# EAGLE board µECU-CAN-Adapter_Heizkoerperthermostat (EAGLE 7.7.0)
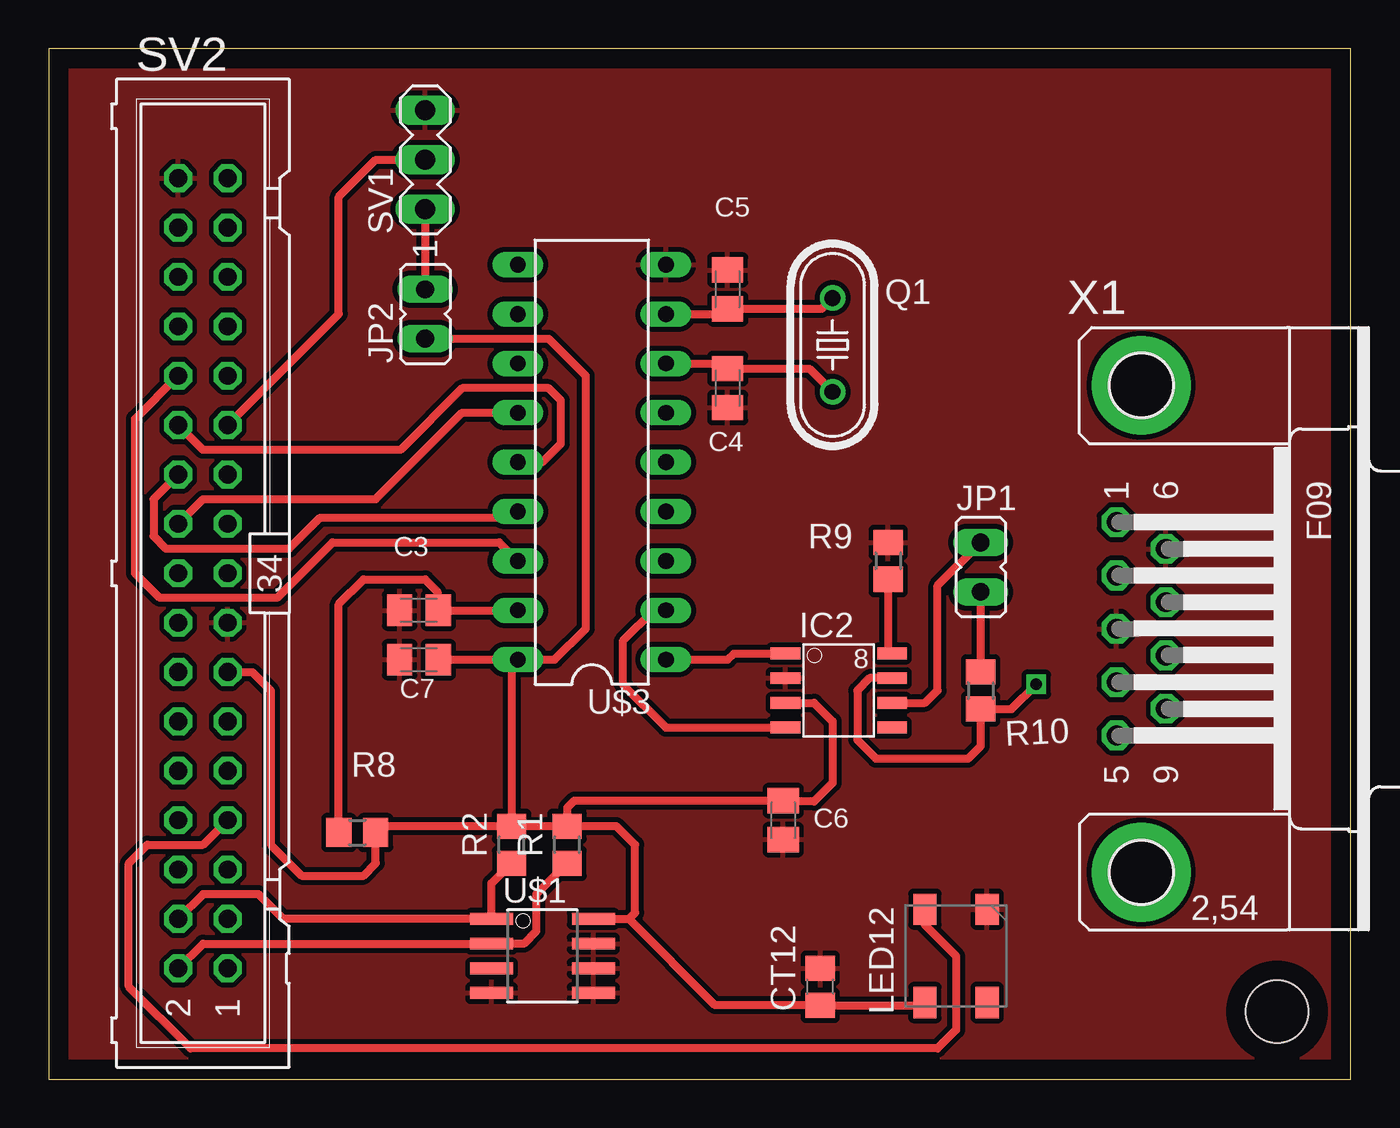
[diagram p0: board, top side]
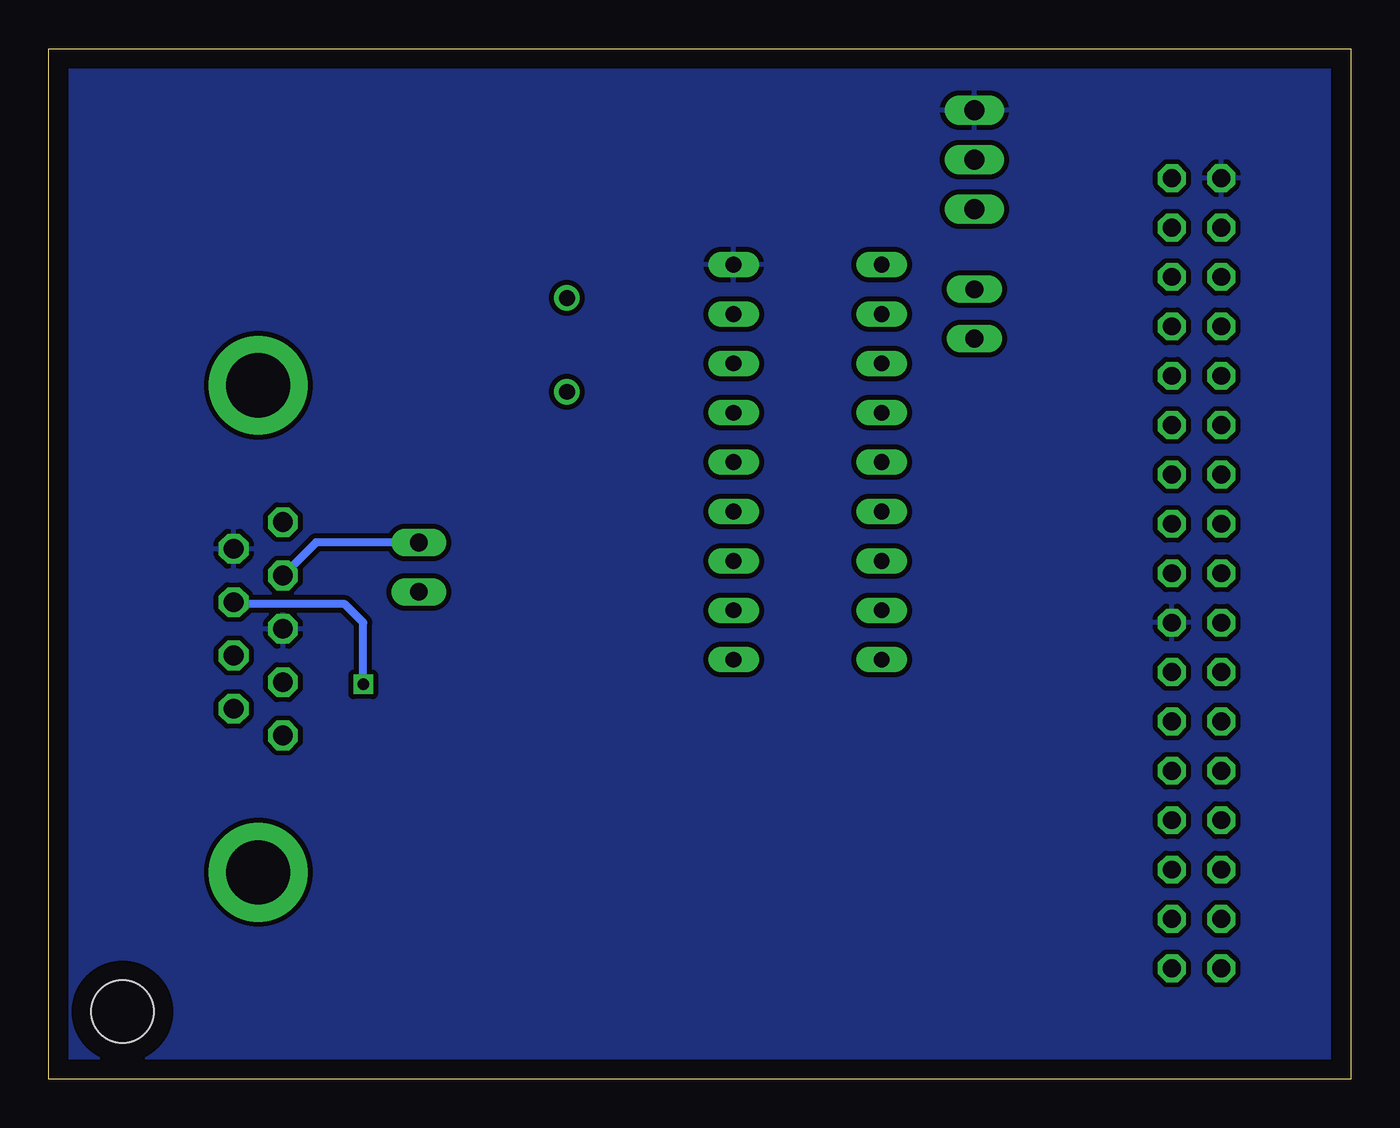
[diagram p1: board, bottom side, seen from below]

Size 66.98 x 53.01 mm. Coordinates in mm from the lower left corner, seen from the top.
Outline: 0,53.01 0,0 66.98,0 66.98,53.01 0,53.01
Copper layers (1*16): Top 0.035mm / dielectric 1.5mm / Bottom 0.035mm
Design rules "default *": minimum track width 6mil, minimum drill 0.35mm, track to track 8mil, track to pad 8mil, pad to pad 8mil, via to via 8mil, smd to smd 6mil, copper to edge 40mil, drill to drill 6mil, minimum pad ring 10mil, minimum via ring 8mil, stop-mask expansion 4mil, vias tented up to drill 0mil, thermal gap 10mil
Holes 3.2 mm at 63.18,3.48

## Footprints (pad centres in the part's own frame; a part is rotated, then mirrored left to right if it is on the bottom)
C0805K = smd 1.3 x 1.6: 1 -1,0; 2 1,0
C0805 = smd 1.3 x 1.5: 1 -0.95,0; 2 0.95,0
SO8 = smd 0.61 x 1.524: 1 -1.27,-2.743; 2 0,-2.743; 3 1.27,-2.743; 4 2.54,-2.743; 5 2.54,2.743; 6 1.27,2.743; 7 0,2.743; 8 -1.27,2.743
JP1 = drill 0.914 long: 1 0,-1.27; 2 0,1.27
WS2812_4 = smd 1.6 x 1.2: 1 2.4,-1.6; 2 2.4,1.6; 3 -2.4,1.6; 4 -2.4,-1.6
HC49/S = drill 0.813: 1 -2.413,0; 2 2.413,0
R0805 = smd 1.3 x 1.5: 1 -0.95,0; 2 0.95,0
MA03-1 = drill 1.016 long: 1 -2.54,0; 2 0,0; 3 2.54,0
ML34 = drill 0.914 octagon: 1 -20.32,-1.27; 2 -20.32,1.27; 3 -17.78,-1.27; 4 -17.78,1.27; 5 -15.24,-1.27; 6 -15.24,1.27; 7 -12.7,-1.27; 8 -12.7,1.27; 9 -10.16,-1.27; 10 -10.16,1.27; 11 -7.62,-1.27; 12 -7.62,1.27; 13 -5.08,-1.27; 14 -5.08,1.27; 15 -2.54,-1.27; 16 -2.54,1.27; 17 0,-1.27; 18 0,1.27; 19 2.54,-1.27; 20 2.54,1.27; 21 5.08,-1.27; 22 5.08,1.27; 23 7.62,-1.27; 24 7.62,1.27; 25 10.16,-1.27; 26 10.16,1.27; 27 12.7,-1.27; 28 12.7,1.27; 29 15.24,-1.27; 30 15.24,1.27; 31 17.78,-1.27; 32 17.78,1.27; 33 20.32,-1.27; 34 20.32,1.27
SO08 = smd 0.61 x 2.21: 1 -1.905,-2.616; 2 -0.635,-2.616; 3 0.635,-2.616; 4 1.905,-2.616; 5 1.905,2.616; 6 0.635,2.616; 7 -0.635,2.616; 8 -1.905,2.616
DIL18 = drill 0.813 long: 1 -10.16,-3.81; 2 -7.62,-3.81; 3 -5.08,-3.81; 4 -2.54,-3.81; 5 0,-3.81; 6 2.54,-3.81; 7 5.08,-3.81; 8 7.62,-3.81; 9 10.16,-3.81; 10 10.16,3.81; 11 7.62,3.81; 12 5.08,3.81; 13 2.54,3.81; 14 0,3.81; 15 -2.54,3.81; 16 -5.08,3.81; 17 -7.62,3.81; 18 -10.16,3.81
F09HP = drill 1.016 octagon: 1 -5.486,-1.27; 2 -2.743,-1.27; 3 0,-1.27; 4 2.743,-1.27; 5 5.486,-1.27; 6 -4.115,1.27; 7 -1.372,1.27; 8 1.372,1.27; 9 4.115,1.27 | drill 3.302 pad 5.08: G1 -12.522,0; G2 12.522,0

## Placement (x,y rotation side)
C3  100nF  [C0805K]  19.05,24.12 180 top
C4  22pF  [C0805K]  34.92,35.55 270 top
C5  22pF  [C0805K]  34.92,40.63 90 top
C6  100nF  [C0805K]  37.78,13.32 270 top
C7  100nF  [C0805K]  19.05,21.58 180 top
CT12  100n  [C0805]  39.69,4.75 90 top
IC2  PCA82C251  [SO8]  40.64,20.62 270 top
JP1  [JP1]  47.94,26.34 0 top
JP2  [JP1]  19.37,39.36 0 top
LED12  WS2812_4H  [WS2812_4]  46.67,6.34 90 top
Q1  16MHz  [HC49/S]  40.32,37.77 90 top
R1  10k  [R0805]  26.67,12.05 90 top
R2  10k  [R0805]  23.81,12.05 90 top
R8  10k  [R0805]  15.88,12.69 0 top
R9  10k  [R0805]  43.18,26.66 270 top
R10  120  [R0805]  47.94,19.99 270 top
SV1  [MA03-1]  19.37,47.29 90 top
SV2  [ML34]  7.94,26.02 90 top
U$1  [SO08]  25.4,6.34 270 top
U$3  MCP2515PDIP  [DIL18]  27.94,31.74 90 top
X1  [F09HP]  56.2,23.16 270 top

## Library data of the parts
C3-C7 CT12 R1 R2 R8-R10 = rcl
IC2 = philips
JP1 JP2 = jumper
LED12 U$1 U$3 = sp2
Q1 = crystal; OC_FARNELL: 1667008; OC_NEWARK: unknown
SV1 = con-lstb; OC_FARNELL: unknown; OC_NEWARK: unknown
SV2 = con-harting-ml; OC_FARNELL: unknown; OC_NEWARK: unknown
X1 = con-subd; OC_FARNELL: unknown; OC_NEWARK: unknown

## Nets
+5V: C6.1 C7.1 CT12.1 IC2.3 JP2.1 LED12.3 R1.2 R2.2 R8.2 SV2.13 U$1.8 U$3.18
+12V: SV2.33
AREF: SV2.16
GND: C3.2 C4.2 C5.2 C6.2 C7.2 CT12.2 IC2.2 LED12.1 R9.1 SV1.3 SV2.15 SV2.34 U$1.4 U$1.5 U$1.6 U$1.7 U$3.9 X1.3 X1.6
N$1: SV2.14
N$2: C5.1 Q1.2 U$3.8
N$3: C4.1 Q1.1 U$3.7
N$4: C3.1 R8.1 U$3.17
N$5: IC2.8 R9.2
N$6: IC2.4 U$3.2
N$7: IC2.1 U$3.1
N$8: IC2.7 R10.2 X1.7
N$9: JP1.1 R10.1
N$10: IC2.6 JP1.2 X1.2
N$12: LED12.4
N$16: JP2.2 SV1.1
N$40: SV2.29
N$41: SV2.31
N$44: SV2.32
N$45: SV2.30
PB0: SV2.27
PB1: SV2.28
PB2: SV2.26 U$3.16
PB3: SV2.24 U$3.14
PB4: SV2.22 U$3.15
PB5: SV2.20 U$3.13
PB6: SV2.17
PB7: SV2.19
PC0: SV2.12
PC1: SV2.10
PC2: SV2.8
PC3: SV2.6
PC4: R2.1 SV2.4 U$1.1
PC5: R1.1 SV2.2 U$1.2
PC6: SV2.1
PD0: SV2.3
PD1: SV2.5
PD2: LED12.2 SV2.7
PD3: SV2.9
PD4: SV2.11
PD5: SV2.21
PD6: SV1.2 SV2.23
PD7: SV2.25

## Tracks (layer width: path | path; a pad name or v marks a point on that pad's centre or on a via)
+5V
  Top 0.406: R1.2 29.21,13.01 30.16,12.05 30.16,8.56 29.84,8.24 | R1.2 R2.2 | R2.2 17.14,13 R8.2 16.83,11.1 16.19,10.46 13.02,10.46 11.43,12.05 11.43,19.99 10.48,20.94 SV2.13 | LED12.3 44.94,3.8 CT12.1 34.29,3.8 29.84,8.24 | IC2.3 39.37,19.35 40.32,18.4 40.32,15.23 39.37,14.27 37.83,14.27 C6.1 27.04,14.32 26.67,13.96 R1.2 | U$3.18 23.81,21.58 R2.2 | C7.1 U$3.18 | JP2.1 25.72,38.09 27.62,36.18 27.62,23.16 26.04,21.58 U$3.18 | U$1.8 29.84,8.24
GND
  pour Top (isolate 0.254): 0,53.01 0,-0.01 66.99,-0.01 66.99,53.01
  pour Bottom (isolate 0.254): 66.99,53.01 0,53.01 0,-0.01 66.99,-0.01
N$2
  Top 0.406: U$3.8 34.66,39.36 C5.1 39.77,39.63 Q1.2
N$3
  Top 0.406: U$3.7 34.66,36.82 C4.1 39.13,36.55 Q1.1
N$4
  Top 0.406: U$3.17 C3.1 20,24.16 20,25.07 19.37,25.71 16.19,25.71 14.93,24.44 R8.1
N$5
  Top 0.406: R9.2 43.18,22.1 IC2.8
N$6
  Top 0.406: U$3.2 31.11,24.12 29.53,22.53 29.53,20.31 31.75,18.09 IC2.4
N$7
  Top 0.406: U$3.1 34.92,21.58 35.24,21.89 IC2.1
N$8  (via drill 0.6)
  Top 0.406: IC2.7 42.23,20.62 41.59,19.99 41.59,17.45 42.55,16.5 47.31,16.5 47.94,17.13 R10.2 49.53,19.04 v50.8,20.31
  Bottom 0.406: v50.8,20.31 50.8,23.48 51.75,24.44 57.37,24.44 X1.7
N$9
  Top 0.406: R10.1 JP1.1
N$10
  Top 0.406: IC2.6 45.09,19.35 45.72,19.99 45.72,25.39 JP1.2
  Bottom 0.406: JP1.2 53.23,27.61 X1.2
N$16
  Top 0.406: SV1.1 JP2.2
PB2
  Top 0.406: SV2.26 4.45,33.96 4.45,26.02 5.71,24.75 11.75,24.75 14.61,27.61 23.18,27.61 U$3.16
PB3
  Top 0.406: U$3.14 25.4,31.74 26.35,32.69 26.35,34.91 25.72,35.55 21.27,35.55 18.1,32.37 7.94,32.37 SV2.24
PB4
  Top 0.406: SV2.22 5.4,29.83 5.4,27.93 6.03,27.29 12.38,27.29 13.97,28.88 23.81,28.88 U$3.15
PB5
  Top 0.406: SV2.20 7.94,29.83 16.83,29.83 21.27,34.28 U$3.13
PC4
  Top 0.406: R2.1 22.78,10.07 U$1.1 12.06,8.24 10.79,9.51 7.94,9.51 SV2.4
PC5
  Top 0.406: SV2.2 7.94,6.97 U$1.2 24.45,6.97 25.08,7.61 25.08,9.51 R1.1
PD2
  Top 0.406: LED12.2 45.07,7.94 46.67,6.34 46.67,2.53 45.72,1.57 7.3,1.57 4.13,4.75 4.13,11.1 5.08,12.05 7.94,12.05 SV2.7
PD6
  Top 0.406: SV2.23 14.92,39.36 14.92,45.39 16.83,47.29 SV1.2